# Altium PCB Y1.PcbDoc
Units mil, origin at the board's own origin, x right, y up, seen from the top; angles counter-clockwise.
Board outline 1510 x 1378.94 mil, 4 copper layers (Top Layer, Layer 1, Layer 2, Bottom Layer), stack 62.205 mil thick; 69 components, 77 nets, 245 pads, 64 vias.
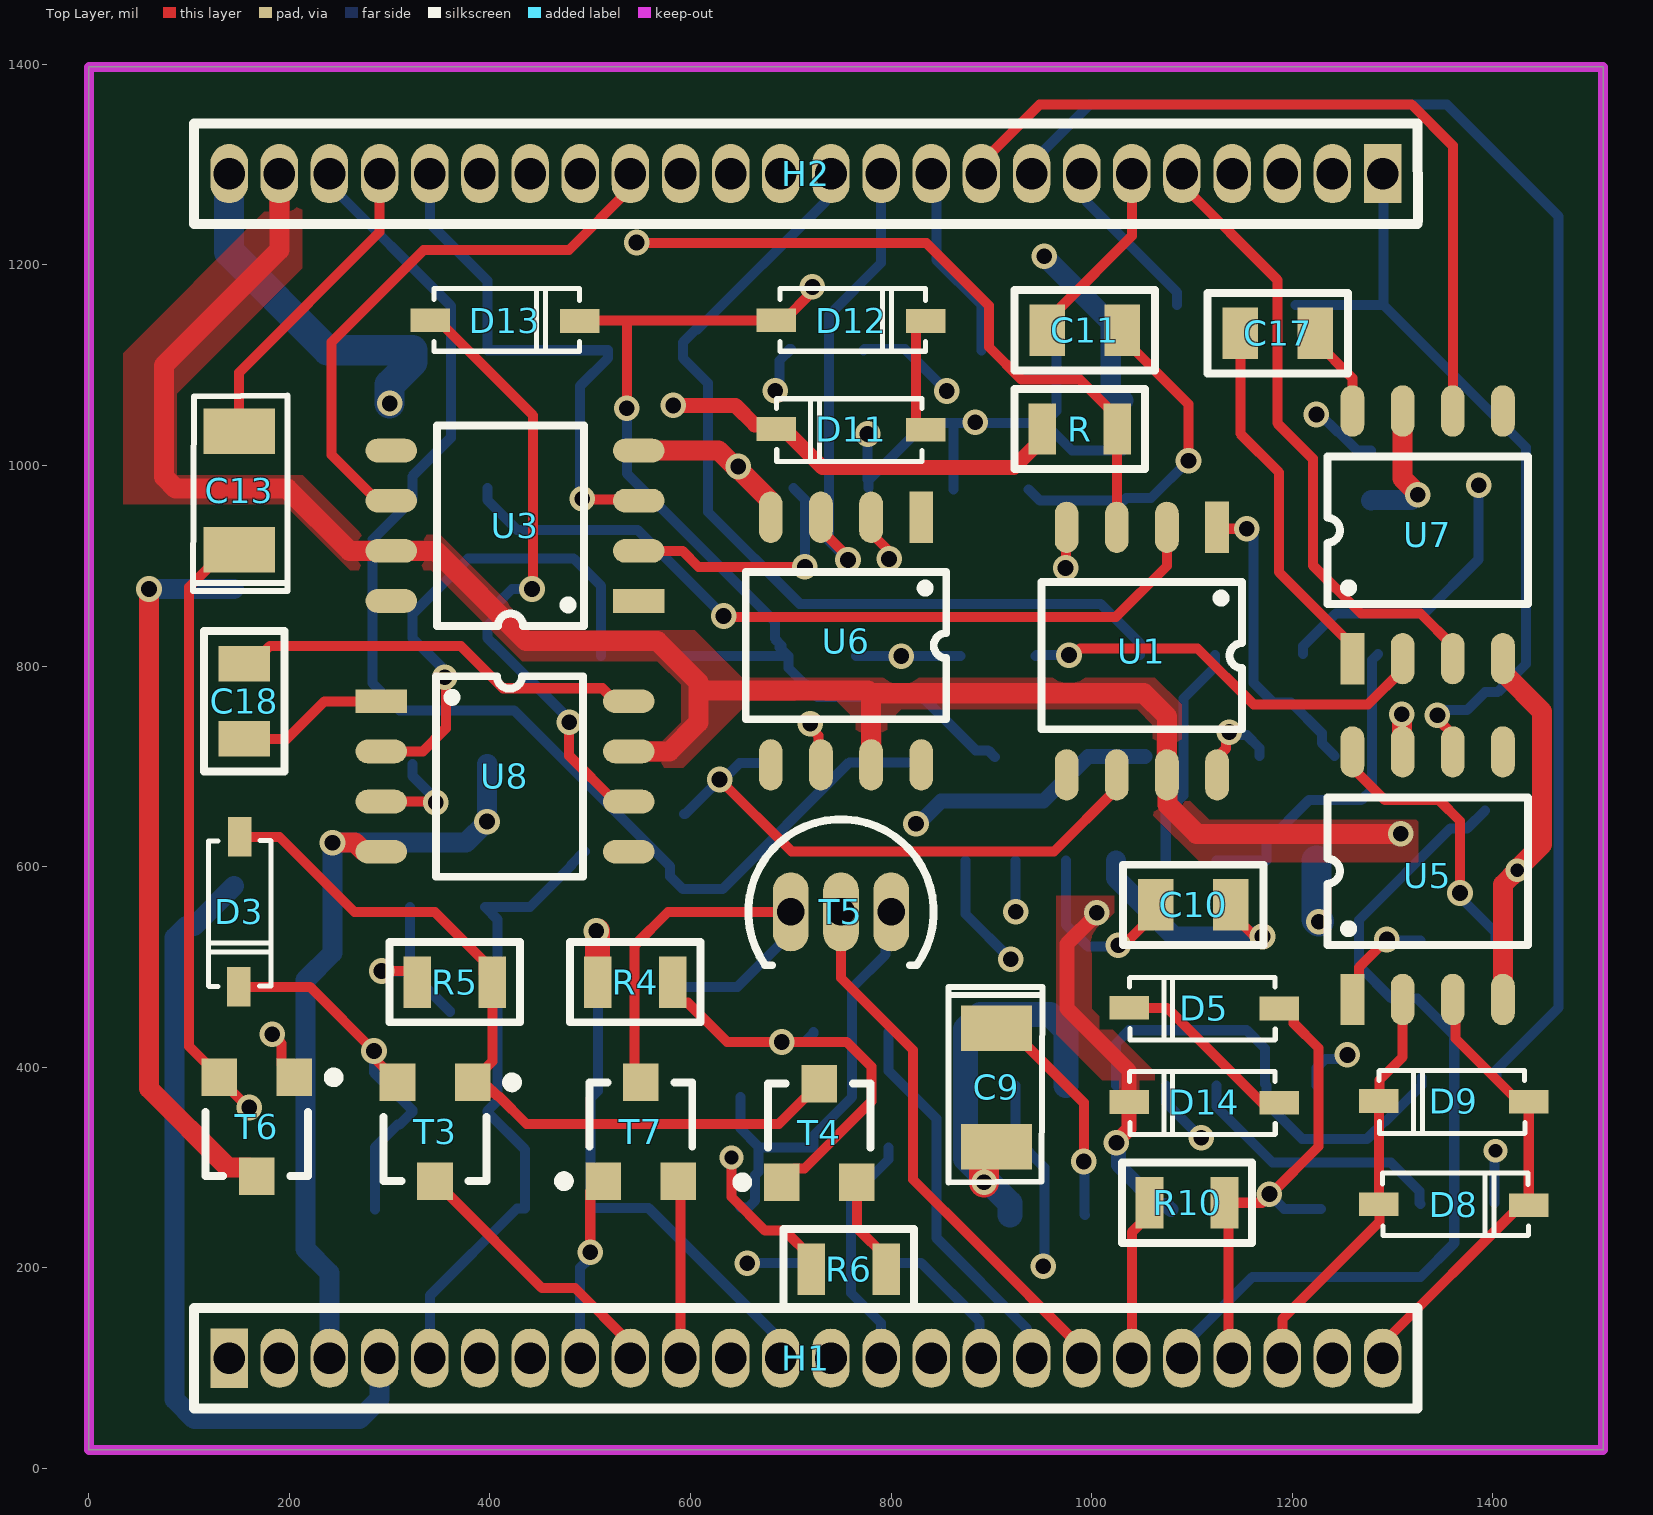
[diagram p0: Top Layer view]
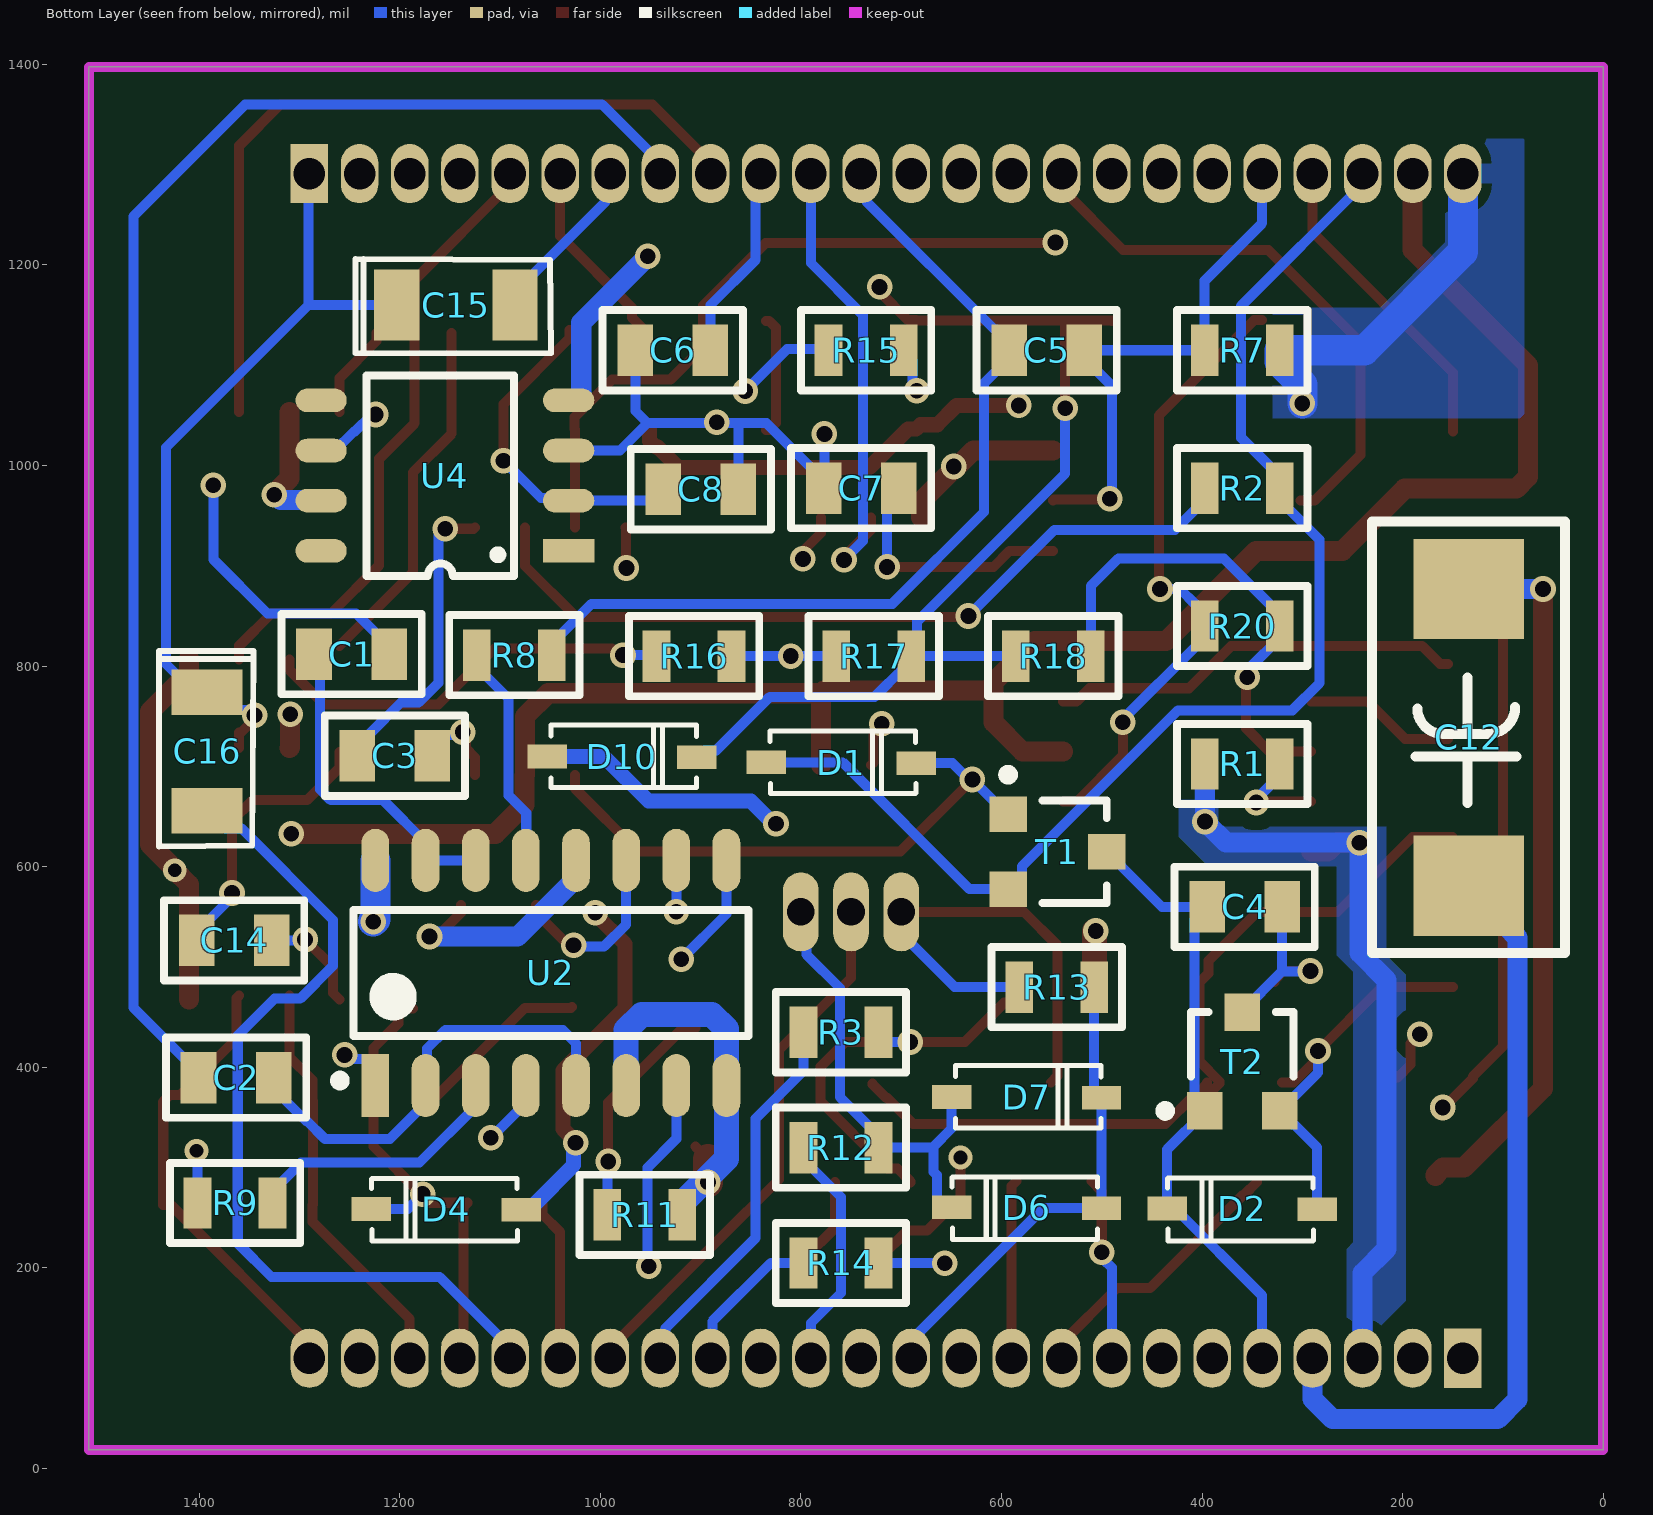
[diagram p1: Bottom Layer view, seen from below]
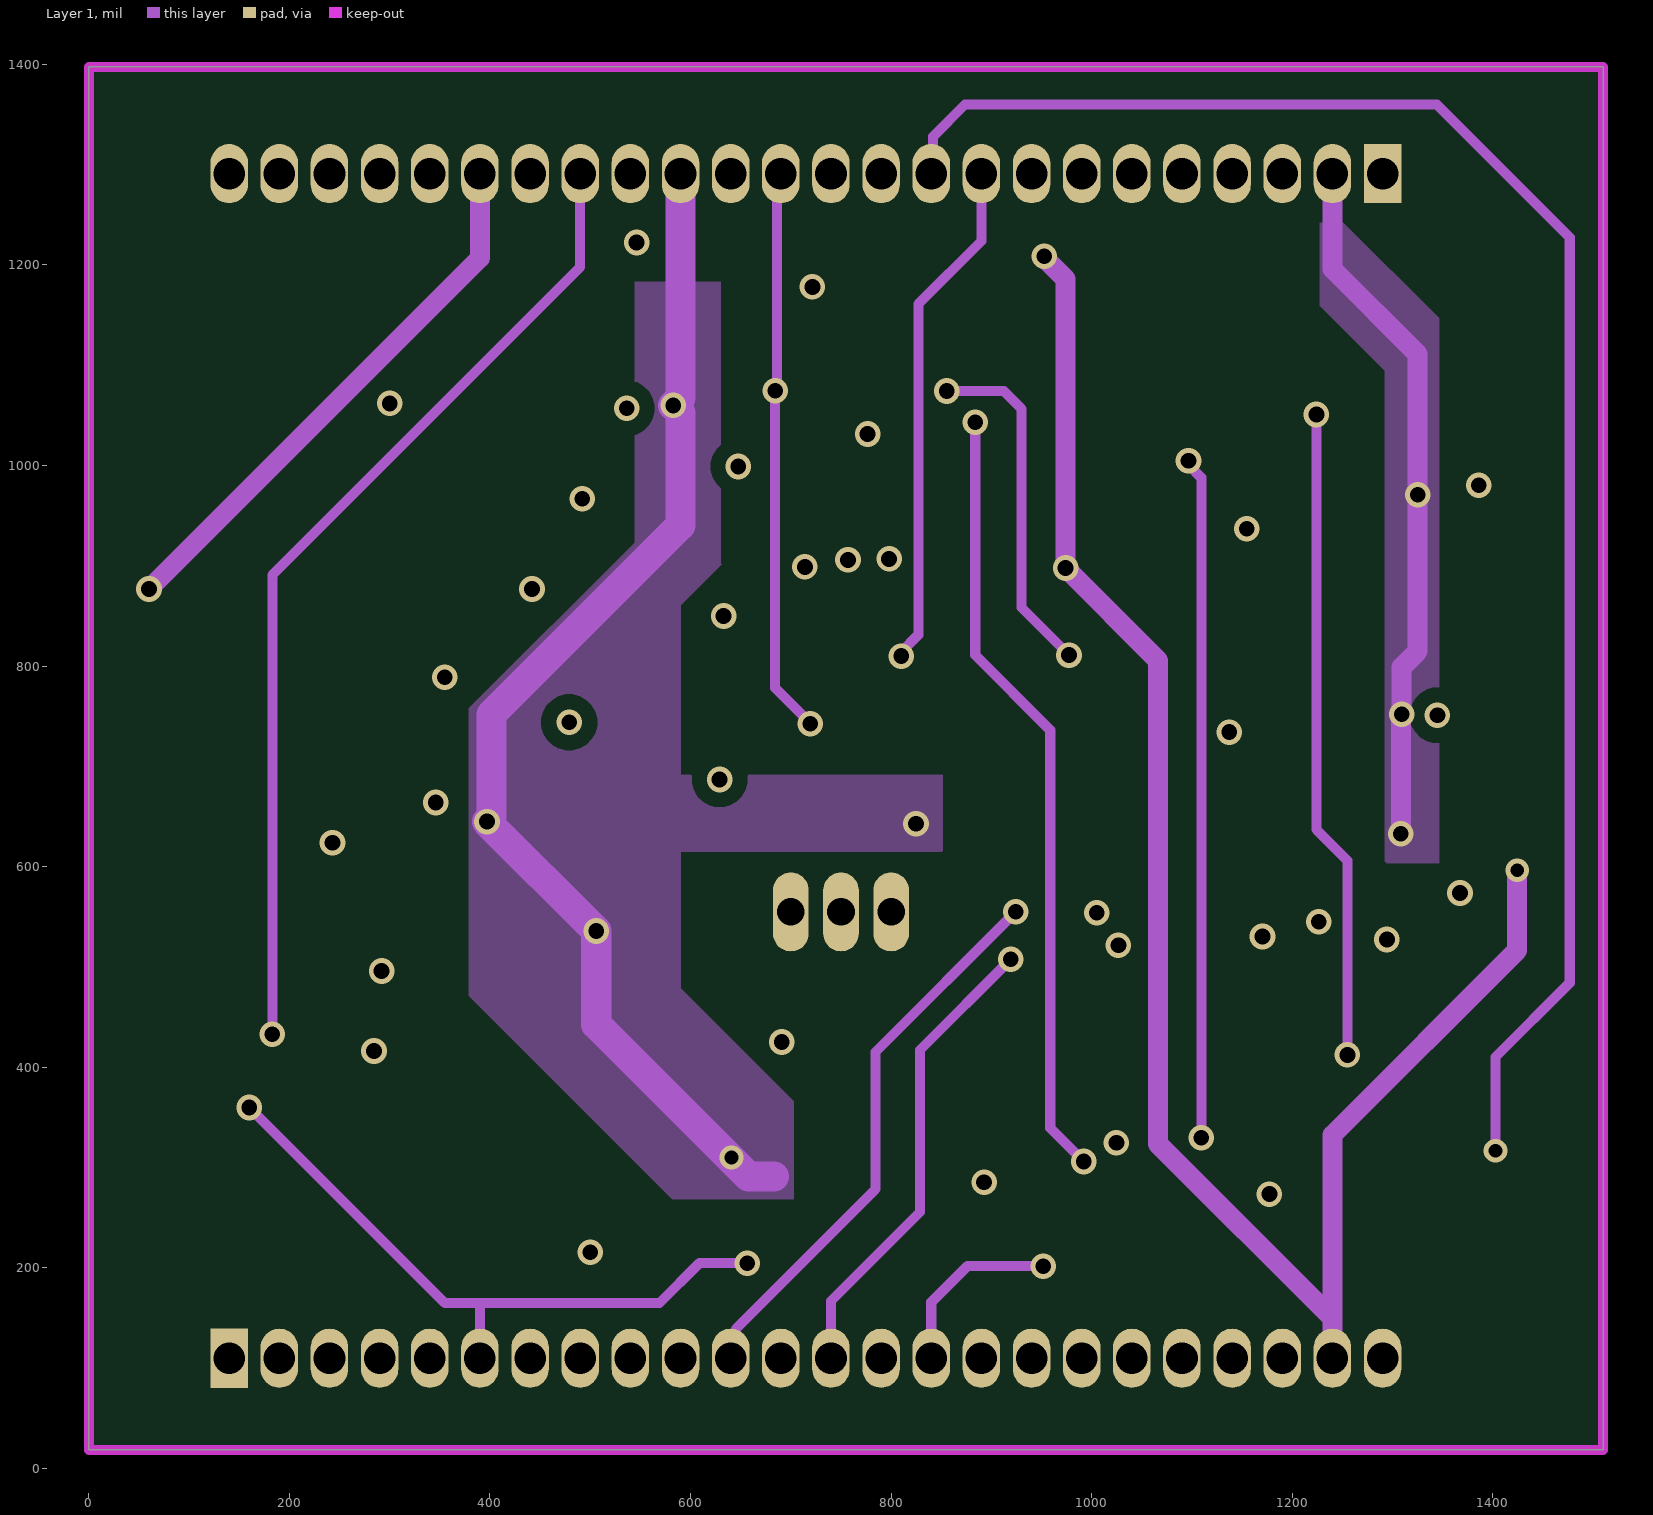
[diagram p2: Layer 1]
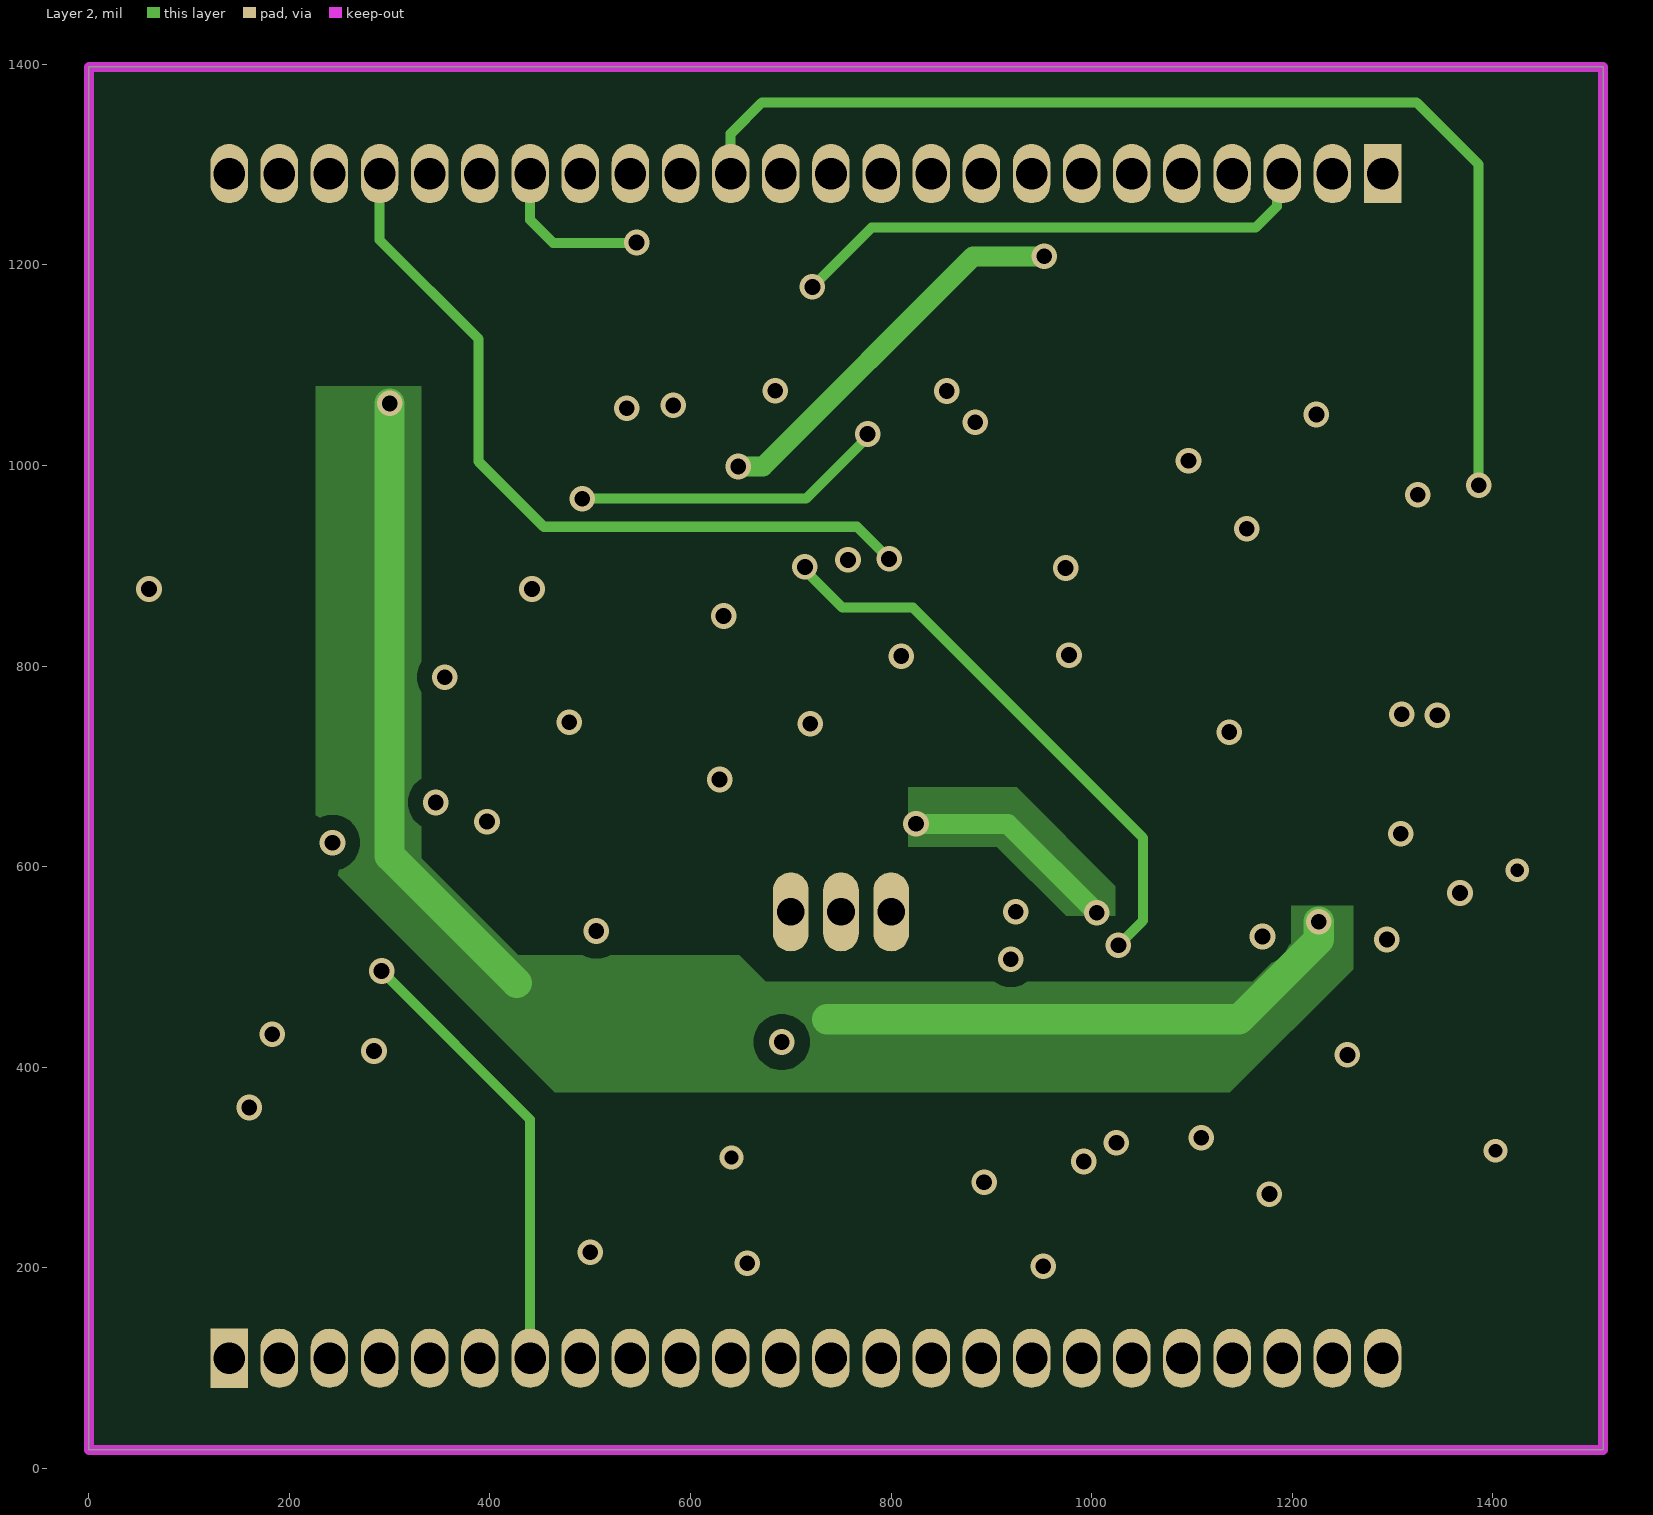
[diagram p3: Layer 2]

## Layer stack, top to bottom
Top Solder: solder mask 0.4, Solder Resist, Dk 3.5
Top Layer: signal copper 1.378
Dielectric 2: prepreg 4.7244, PP-006, Dk 4.1
Layer 1: signal copper 1.378
Dielectric 1: dielectric 47.2441, FR-4, Dk 4.8
Layer 2: signal copper 1.378
Dielectric 3: prepreg 4.7244, PP-006, Dk 4.1
Bottom Layer: signal copper 1.378
Bottom Solder: solder mask 0.4, Solder Resist, Dk 3.5

## Board outline
0,18.7 0,1397.64 1510,1397.64 1510,18.7

## Design rules (kind name [scope] priority, off if disabled: settings)
Clearance Clearance_polygon_via [InPolygon vs IsVia] p1: gap=15 ignorepadtopadclearanceinfootprint=FALSE
Clearance [All] p2: gap=10 ignorepadtopadclearanceinfootprint=FALSE except(0: Arc-Hole Track-Hole SMDPad-Hole THPad-Hole Via-Hole Fill-Hole Poly-Hole Region-Hole Text-Hole)
MinimumSolderMaskSliver [All] p1: minsoldermaskwidth=3.94
PolygonConnect PolygonConnect_1 [IsPolygon vs isvia] p1: connectstyle=Direct reliefconductorwidth=10 reliefentries=4 polygonreliefangle="90 Angle" airgapwidth=10
PolygonConnect [All] p2: connectstyle=Relief reliefconductorwidth=20 reliefentries=4 polygonreliefangle="90 Angle" airgapwidth=10
RoutingVias [All] p1: holewidth=13.78 width=23.62 viastyle="Through Hole" minholewidth=11.81 minwidth=21.65 maxholewidth=15.75 maxwidth=31.5
SilkToSolderMaskClearance [IsPad] p1: minsilkscreentomaskgap=3.94 clearancetoexposedcopper=TRUE
SolderMaskExpansion [All] p1: expansion=4 istentingtop=FALSE
Width Width_PWR [(InNet('-13V') OR InNet('GND'))] p1: maxlimit=100 minlimit=10 preferedwidth=15
Width [All] p2: maxlimit=50 minlimit=10 preferedwidth=15
28 further rules are at their usual default settings.

## Components (designator, comment, footprint, x,y, rotation, side; value= is the part's Value field where it differs from the comment)
C1 "3.9 nF/50V" C0805 1248.03,812.01 r0 bottom
C2 "3.9 nF/50V" C0805 1363.19,389.76 r0 bottom
C3 "4.7 nF/50V" C0805 1204.72,710.63 r180 bottom
C4 "300 pF/50V" C0805 357.6,560 r0 bottom
C5 "120 pF/50V" C0805 555,1115 r0 bottom
C6 "120 pF/50V" C0805 927.6,1115 r180 bottom
C7 "39 pF/50V" C0805 740,977.5 r180 bottom
C8 "39 pF/50V" C0805 899.61,976.38 r180 bottom
C9 "3.3 µF/10V" 3216 905,380 r270 top value="47uF/16 - 50V"
C10 "910 pF/50V" C0805 1101.38,562.01 r0 top
C11 "910 pF/50V" C0805 993.19,1135 r180 top
C12 "15 µF/16 V" "smd 7343" 134.17,600 r90 bottom value=10uF/50V
C13 "3.3 µF/16 V" 3216 150,975 r90 top value=10uF/50V
C14 "36 pF/50V" C0805 1365.16,526.57 r0 bottom
C15 "4.7 µF/50V" 3216 1144.06,1160 r180 bottom value=10uF/50V
C16 "1.5 µF/50V" 3216 1392,715 r270 bottom value=10uF/50V
C17 "36 pF/50V" C0805 1185.6,1132 r0 top
C18 "100 pF/50V" C0805 155,765 r90 top
D1 "1N4148" SOD123 759.84,703.74 r180 bottom
D2 "1N4148" SOD123 360,258.84 r0 bottom
D3 "1N4148" SOD123 150,555 r270 top
D4 "1N4148" SOD123 1153.6,258.47 r0 bottom
D5 "1N4148" SOD123 1112,459 r180 top
D6 "1N4148" SOD123 575,260 r0 bottom
D7 "1N4148" SOD123 575,370 r180 bottom
D8 "1N4148" SOD123 1361,263 r0 top
D9 "1N4148" SOD123 1361,366 r180 top
D10 "1N4148" SOD123 978.35,709.65 r180 bottom
D11 "1N4148" SOD123 760,1036 r180 top
D12 "1N4148" SOD123 760,1144.64 r0 top
D13 "1N4148" SOD123 415,1144.64 r0 top
D14 "1N4148" SOD123 1112,365 r180 top
H1 "Header 24" "header 24" 715,110 r0 top
H2 "Header 24" "header 24" 715,1291.1 r180 top
R "51k" R0805 988.19,1036.42 r0 top
R1 "39k" R0805 360,702.5 r0 bottom
R2 "51k" R0805 360,977.5 r0 bottom
R3 "6.2k" R0805 760,435 r0 bottom
R4 "5.6k" R0805 545,485 r0 top
R5 "51k" R0805 365,485 r180 top
R6 "620k" R0805 757.87,198.82 r180 top
R7 "6.2k" R0805 360,1115 r0 bottom
R8 "20k" R0805 1085.63,811.02 r180 bottom
R9 "20k" R0805 1364.17,264.76 r0 bottom
R10 "30k" R0805 1095,265 r180 top
R11 "2k" R0805 955.71,252.95 r180 bottom
R12 "10k" R0805 760,320 r180 bottom
R13 "51k" R0805 545,480 r0 bottom
R14 "39k" R0805 760,205 r0 bottom
R15 "20k" R0805 735,1115 r0 bottom
R16 "20k" R0805 906.53,810 r0 bottom
R17 "30k" R0805 727.43,810 r0 bottom
R18 "150k" R0805 548.33,810 r0 bottom
R20 "150k" R0805 360,840 r0 bottom
T1 "C1815" SOT-23 593.43,652.4 r270 bottom value=C9014
T2 "C1815" SOT-23 397.4,356.57 r180 bottom value=C9014
T3 "A1015" SOT-23 382.62,385 r180 top
T4 "C1815" SOT-23 690.94,285.43 r0 top value=C9014
T5 "2SJ74" TO-92 750,555 r270 top
T6 "A1015" SOT-23 204.8,390 r180 top
T7 "A1015" SOT-23 513.13,286.57 r0 top
U1 "AD707" SOIC8 1050,815 r270 top
U2 "KP1-CD4052" soic16n 1049.21,494.09 r90 bottom
U3 "OP07" SOIC8 425,940 r180 top
U4 "OP07" SOIC8 1155,990 r0 bottom
U5 "AD707" SOIC8 1335,591.06 r90 top
U6 "OP07" SOIC8 755,825 r270 top
U7 "AD707" SOIC8 1335,930.98 r90 top
U8 "AD707" SOIC8 415,690 r0 top

## Footprints (in the part's own frame and the unit in brackets; to place one, negate y for a bottom-side part, rotate by r counter-clockwise, add the part's x,y. Pads: shape width x height; smd on the part's side, far side on the other; paste and mask are expansions set on the pad)
3216 [mm] "Tantalum type A 1206"
  rect 1.15x1.8 smd: 1(-1.5,0) 2(1.5,0)
  silkscreen extent -2.54,-1.22 2.41,1.17, body extent -1.7,-0.9 1.7,0.9, height 1
C0805 [mm]
  rect 0.9x1.3 smd: 1(-0.95,0) 2(0.95,0)
  silkscreen extent -1.78,-1.02 1.78,1.02, body extent -1,-0.6 1,0.6, height 1.5
"header 24" [mm]
  rect 0.95x1.5 hole 0.8: 1(-14.605,0)
  oval 0.95x1.5 hole 0.8: 2(-13.335,0) 3(-12.065,0) 4(-10.795,0) 5(-9.525,0) 6(-8.255,0) 7(-6.985,0) 8(-5.715,0) 9(-4.445,0) 10(-3.175,0) 11(-1.905,0) 12(-0.635,0) 13(0.635,0) 14(1.905,0) 15(3.175,0) 16(4.445,0) 17(5.715,0) 18(6.985,0) 19(8.255,0) 20(9.525,0) 21(10.795,0) 22(12.065,0) 23(13.335,0) 24(14.605,0)
  silkscreen extent -15.5,-1.27 15.49,1.27
R0805 [mm]
  rect 0.7x1.3 smd: 1(-0.95,0) 2(0.95,0)
  silkscreen extent -1.65,-1.02 1.65,1.02, body extent -1,-0.6 1,0.6, height 0.7
"smd 7343" [mm]
  rect 2.54x2.8 smd: 1(-0.483,0) 2(7.037,-0.008)
  silkscreen extent -2.18,-2.44 8.75,2.44, body extent -0.66,-2.3 6.94,2.3, height 4.01
SOD123 [mm]
  rect 1x0.6 smd: 1(-1.899,0.01) 2(1.899,-0.01)
  silkscreen extent -1.8,-0.78 1.89,0.81, body extent -1.8,-0.8 1.9,0.8, height 1.27
SOIC8 [mm]
  rect 1.3x0.6 smd: 1(-3.135,1.905)
  oval 1.3x0.6 smd: 2(-3.135,0.635) 3(-3.135,-0.635) 4(-3.135,-1.905) 5(3.135,-1.905) 6(3.135,-0.635) 7(3.135,0.635) 8(3.135,1.905)
  silkscreen extent -1.75,-2.54 1.98,2.54, body extent -3.06,-2.43 3.08,2.46, height 1.78
soic16n [mm] "SOIC, 16-Leads, Body 9.90x3.90mm, Pitch 1.27mm, IPC Medium Density"
  rect 1.6x0.7 smd: 1(-2.852,4.445)
  oval 1.6x0.7 smd: 2(-2.852,3.175) 3(-2.852,1.905) 4(-2.852,0.635) 5(-2.852,-0.635) 6(-2.852,-1.905) 7(-2.852,-3.175) 8(-2.852,-4.445) 9(2.852,-4.445) 10(2.852,-3.175) 11(2.852,-1.905) 12(2.852,-0.635) 13(2.852,0.635) 14(2.852,1.905) 15(2.852,3.175) 16(2.852,4.445)
  silkscreen extent -2.85,-5 1.6,5.47, body extent -3.06,-5 3.02,5, height 1.65
SOT-23 [mm]
  rect 0.9x0.95 smd: 1(0,0) 2(1.9,0) 3(0.95,2.5)
  silkscreen extent -1.12,-0.13 2.25,2.5, body extent -0.48,-0.19 2.42,2.61, height 1.3
TO-92 [mm] "TO, Flat Index; 3 In-Line, Axial Leads; Body Dia. 4.6mm; Leads 0.41 x 0.39 mm (max)"
  oval 2x0.9 hole 0.7: 1(0,1.27) 2(0,0) 3(0,-1.27)
  silkscreen extent -2.34,-2.34 1.35,2.34

## Part data
C1 C2 C3 C4 C5 C6 C7 C8 C10 C11 C14 C17 C18: library part "Cap ceramic", "None polar capacitor", ASiD Part Number=C-AS
C9: library part CP2, "C 47uF/50V , 220uF/16V", Description 1="470uF/6,3V - 330uF/10V - 220uF/16V", Description 2="100uF/25V - 35V - 47uF/50V - 22uF/100V", Description 3="33uF => 47uF/63V - 1uF => 4,7uF/160V", Description 4="1uF => 2,2uF/250V - 1uF/350V"
C12 C13 C15 C16: library part CP1, "Cap P  0,1uF < 22uF , 16 - 50V", Description 1="10 => 220uF/6,3V/10V - 10uF => 100uF/16V", Description 2="0,1uF => 33uF/50V - 10uF => 22uF/63V", Description 3="0,47uF => 10uF/100V"
D1 D2 D3 D4 D5 D6 D7 D8 D9 D10 D11 D12 D13 D14: library part "Diode S4", "Dán", Chung_Loai=Dán, Don_Vi=Con, Ma_Hang=MH005519, Ten_Linh_Kien="Diode S4 SOD123 ( 1N5819 SOD123)"
R R1 R2 R3 R4 R5 R6 R7 R8 R9 R10 R11 R12 R13 R14 R15 R16 R17 R18 R20: library part Res, "Standard resistor", ASiD Part Number=Res-AS
T1 T2 T4: library part "Trans C1815 HF SMD", "SOT-23"
T3: library part "Trans A1015 BA SMD", "PNP 600mW, ECB"
T5: library part "JFET P CHANNEL"
T6 T7: library part PNP_ECB, "P 600mW, ECB"
U1 U5 U7 U8: library part OP07DD, "Low-Offset Voltage Operational Amplifier, 6 to 36 V, 0 to 70 degC, 8-pin SOIC (D8), Green (RoHS & no Sb/Br)", Manufacturer="Texas Instruments", Rating=Catalog, Supplier Part Number 1=296-9621-5-ND, Total Supply Voltage(Max)(+5V is 5, +/-5V is 10)=36, Total Supply Voltage(Min)(+5V is 5, +/-5V is 10)=6, CMRR(Min)(dB)=94, Code_JEDEC=MS-012, ComponentLink1Description="Manufacturer URL", ComponentLink1URL=http://www.ti.com/, ComponentLink2Description=Datasheet, ComponentLink2URL=http://www.ti.com/lit/ds/symlink/op07d.pdf, ComponentLink3Description="Package Specification", ComponentLink3URL=http://www.ti.com/litv/pdf/msoi002j, DatasheetVersion=SLOS099E, Eco-Plan="Green (RoHS & no Sb/Br)", GBW(Typ)(MHz)=0.6, IIB(Max)(pA)=12000, Iq per channel(Max)(mA)=5, Mounting Technology="Surface Mount", Number of Channels=1, Offset Drift(Typ)(uV/C)=0.7, PackageDescription="8-Pin Plastic Small Outline, Body 4.9 x 3.9 mm, Pitch 1.27 mm", PackageReference=D8, PackageVersion="4040047-3/M, 06/2011", PartNumber=OP07DD, Slew Rate(Typ)(V/us)=0.3, Sub Family="General Purpose Amplifier, High Supply Voltage Amplifier (>=30V), Low Noise Amp (<=10nV/rtHz), Low Offset Voltage Amplifier (<=500uV)", Supplier 1=Digi-Key, Supplier 2=Farnell, Supplier 3=Newark, Supplier 4=Newark, Supplier 5=Mouser, Supplier Part Number 2=1459541, Supplier Part Number 3=61M8137, Supplier Part Number 4=91B7408, Supplier Part Number 5=595-OP07DD, Vio (25C)(Max)(mV)=0.15, Vn at 1kHz(Typ)(nV/rtHz)=9.8
U3 U4 U6: library part 744UD1A/U1-4

## Via types
v1: diameter 25.59, hole 15.75, Top Layer to Bottom Layer, tented both sides, 61 vias
v2: diameter 23.62, hole 13.78, Top Layer to Bottom Layer, 3 vias

## Nets (pads, with @x,y where several pads share a name; then routed paths per layer and width w, separated by ;. In a path a pad name is that pad's centre, name@x,y a point inside that pad or via, vN(x,y) a via of type N, cw(c..) or ccw(c..) an arc to the next point about the centre after c; other vN are vias at no path point)
1_1: H1.1
1_2: H1.2
1_3: D4.1 D10.1 D11.2 D14.2 H1.3 H2.15 R1.2 R4.1 R6.2 R.1 U8.4 | length 3489.6
  Top Layer w10: v2(640.75,310.04) 640.75,270.67 674.25,237.17 693.94,237.17 720.47,210.63 R6.2
  Top Layer w15: v1(582.68,1060.04) 644.69,1060.04 664.02,1040.7 680.94,1040.7 D11.2 693.13,1036.39 731.48,998.03 922.24,998.03 942.54,1018.33 944.51,1018.33 950.79,1024.61 R.1 ; v1(1004.92,554.13) 1004.92,552.67 975.39,523.14 975.39,458.66 1037.25,396.8 1037.25,361.09 1037.27,338.48 1024.61,325.82 v1(1024.61,324.8)
  Top Layer w20: v1(243,624) 265.65,624 274.65,615 U8.4
  Top Layer w25: R4.1@507.22,485.38 v1@507.22,536
  Layer 1 w30: H2.15 590,1067.36 v1(582.68,1060.04) 590,1052.72 590,940.39 401.57,751.97 401.57,649.57 v1(397,645) v1(506,536) 506,442.82 657.85,290.97 682.7,290.97 683.07,291.34
  Layer 2 w20: v1(824.8,642.95) 825.04,642.72 916.34,642.72 v1(1004.92,554.13)
  Bottom Layer w15: v1(824.8,642.95) 827.37,642.95 849.77,665.35 951.77,665.35 996.45,710.03 D10.1 ; v1(1024.61,324.8) 1026.63,322.78 1026.63,302.42 1066.67,262.39 1074.54,262.39 D4.1
  Bottom Layer w20: H1.3 240,195 216,219 216,487 243,514 v1(243,624) 376,624 v1(397,645) 397.2,645.2 397.2,702.3 R1.2
1_4: C12.1 H1.4 | length 802.6
  Bottom Layer w20: C12.1@145,581 105,541 97.35,541 85.63,529.28 85.63,68.9 105.32,49.21 269.69,49.21 290,69.53 H1.4
1_5: C4.2 D2.2 H1.5 T1.3 T2.1 | length 642.2
  Bottom Layer w10: H1.5 340,172.35 426.87,259.22 D2.2 434.75,318.24 397.4,355.59 T2.1 407.72,366.89 407.72,547.28 C4.2 440,560 481.3,601.3 481.3,602.28 494.02,615 T1.3
1_6: C13.1 H1.6 R14.1 T6.2 | length 1324.5
  Top Layer w10: C13.1 137.2,915.94 119.57,898.31 100,878.74 100,420.98 130,390.98 T6.2 130,389.02 159.02,360 v1(160,360)
  Layer 1 w10: v1(160,360) 355,165 390,165 ; H1.6 390,165 ; v1(656.5,204.72) 608.72,204.72 569,165 390,165
  Bottom Layer w10: v1(656.5,204.72) 722.32,204.72 R14.1
1_7: C4.1 H1.7 R5.2 T2.3 | length 645.9
  Top Layer w10: v1(292,496) 318.82,496 327.6,487.22 R5.2 ; H1.7@434.76,115.24 H1.7
  Layer 2 w10: v1(292,496) 440,348 H1.7
  Bottom Layer w10: v1(292,496) 292.21,495.79 320.2,495.79 ; C4.1 320.2,495.79 ; T2.3 360,455.98 320.2,495.79
1_8: H1.8 T7.1 | length 184.9
  Top Layer w10: v1(500,215.55) 500,276.38 T7.1@510.2,286.57
  Bottom Layer w10: H1.8 490,200.31 497.39,207.71 497.39,212.94 v1(500,215.55)
1_9: H1.9 T3.3 | length 277.3
  Top Layer w10: T3.3 345.22,285.59 357.93,272.87 358.92,272.87 451.67,180.12 484.88,180.12 540,125 H1.9
1_10: H1.10 T7.2 | length 178.6
  Top Layer w10: T7.2@585,286.57 590,281.58 H1.10
1_11: H1.11 U2.10 | length 614.1
  Layer 1 w10: H1.11 645.24,115.24 645.24,139.34 784.45,278.54 784.45,415.35 v1(924.21,555.12)
  Bottom Layer w10: v1(924.21,555.12) U2.10
1_12: D6.1 D7.2 H1.12 R13.1 | length 486
  Bottom Layer w10: R13.1 507.6,376.42 500.79,369.61 D7.2 D6.1 558.3,259.61 690,127.91 H1.12
1_13: H1.13 U2.9 | length 589.3
  Layer 1 w10: H1.13 740,167.17 828.74,255.91 828.74,417.32 v1(919.29,507.87)
  Bottom Layer w10: U2.9 874.21,552.95 v1(919.29,507.87)
1_14: H1.14 R12.1 | length 237.9
  Bottom Layer w10: H1.14 790,145 760,175 760,270.79 797.4,308.19 R12.1
1_15: H1.15 U2.7 | length 374.7
  Layer 1 w10: H1.15 840,165.79 875.98,201.77 v1(951.77,201.77)
  Bottom Layer w10: U2.7 924.21,328.74 952.76,300.2 952.76,202.76 v1(951.77,201.77)
1_16: H1.16 R14.2 | length 152.5
  Bottom Layer w10: R14.2 830,205 888.26,146.74 888.26,111.74 H1.16
1_17: H1.17 R3.2 | length 384.1
  Bottom Layer w10: R3.2 797.4,396.5 845,348.9 845,230 934.76,140.24 934.76,115.24 H1.17
1_18: H1.18 T5.2 | length 544.4
  Top Layer w10: T5.2 750,489.17 821.85,417.32 821.85,288.15 884,226 990,120 H1.18
1_19: H1.19 R10.2 | length 162.3
  Top Layer w10: H1.19 1040,235.59 1057.6,253.19 R10.2
1_20: C16.2 H1.20 | length 872.6
  Bottom Layer w10: H1.20 1090,120.83 1160.12,190.94 1327.76,190.94 1361.46,224.65 1361.46,431.85 1324.8,468.5 1299.21,468.5 1266.5,501.22 1266.5,547.01 1357.8,638.31 1374.36,638.31 C16.2
1_21: D4.2 D5.1 H1.21 R10.1 | length 475.9
  Top Layer w10: R10.1 1136.2,261.2 1136.2,113.8 H1.21 ; R10.1@1136.2,265 v1@1170,265 ; v1@1177.89,272.89 1226.14,321.14 1226.14,419.22 1201.43,443.93 1201.43,451.8 1194.62,458.61 D5.1
  Bottom Layer w10: v1(1177.17,273.62) 1191.93,258.86 D4.2
1_22: D8.1 D9.2 H1.22 U5.2 | length 411.9
  Top Layer w10: H1.22 1190,149 1287,246 1287,262.64 D8.1 D9.2 1286.95,367.09 1286.95,387.34 1310,410.39 U5.2@1310,471.58
1_23: H1.23 U1.4 U3.4 U4.4 U5.4 U6.4 U7.4 | length 2895.8
  Top Layer w10: v1(974,897.81) 974.5,898.31 974.5,937.92 U1.4
  Top Layer w20: U3.4 627.97,1015 643.95,999.02 v1(647.64,999.02) 647.64,996.79 680,964.43 U6.4 ; U5.4 1410,582.24 v2(1424.21,596.46) 1424.21,597.44 1449.11,622.33 1449.11,754.67 1410,793.78 U7.4
  Layer 1 w20: v1(952.76,1208.66) 952.76,1207.15 974,1185.9 v1(974,897.81) 1065.94,805.87 1065.94,323.82 1240,149.76 ; H1.23 1240,149.76 ; v2(1424.21,596.46) 1424.21,516.73 1240,332.52 1240,149.76
  Layer 2 w20: v1(647.64,999.02) 672.18,999.02 881.82,1208.66 v1(952.76,1208.66)
  Bottom Layer w20: v1(952.76,1208.66) 1019,1142.42 1019,1071.29 1025.29,1065 U4.4
1_24: D8.2 D9.1 H1.24 U5.3 | length 463.8
  Top Layer w10: H1.24 1290,124.74 1427.87,262.61 D8.2 D9.1 1428.94,372.42 1418.92,372.42 1362.61,428.73 1362.61,468.97 U5.3@1360,471.58
1_25: C15.1 C16.1 H2.1 U5.6 | length 785.6
  Top Layer w10: v1(1344.65,751) 1347.25,748.39 1347.25,744.7 1358.14,733.81 1360,733.81 U5.6@1360,718.42
  Bottom Layer w10: C15.1 1291,1160 ; H2.1 1291,1290.1 1291,1160 ; v1(1344.65,751) 1347.69,751 1353.1,756.42 1374.36,756.42 C16.1 1404.8,774.06 1433,802.26 1433,1018 1291,1160
1_26: H2.2 H2.23 U1.7 U3.7 U4.7 U5.7 U6.7 U7.7 U8.7 | length 2843.5
  Top Layer w20: H2.23 190,1215 75,1100 75,988.72 86.72,977 198,977 260,915 U3.7 346,915 436,825 567,825 608,784 608,744 579,715 U8.7 ; 608,775.91 777.09,775.91 780,773 ; U6.7 780,773 ; v1(1308.07,632.87) 1104.65,632.87 1075.69,661.83 1075.69,690.89 U1.7 1075,750 1052,773 780,773 ; v1(1309.06,751.97) 1309.53,751.5 1309.53,718.89 U5.7@1310,718.42 ; U7.7@1310,1053.42 1310,987 1325,972 v1(1325,971)
  Layer 1 w20: H2.2 1240,1196.02 1325,1111.02 v1(1325,971) 1325,815 1309.06,799.06 v1(1309.06,751.97) 1308.56,751.48 1308.56,633.37 v1(1308.07,632.87)
  Bottom Layer w20: U4.7 1279.11,965.69 1318.71,965.69 1324.02,971 v1(1325,971)
1_27: D10.2 D12.1 D13.2 H2.3 R17.1 R18.2 | length 1549.4
  Top Layer w10: D13.2 490.14,1144.64 536.42,1144.64 ; v1(536.42,1057.09) 536.42,1144.64 ; v1(721.46,1178.15) 721.46,1173.36 693.13,1145.03 D12.1 684.86,1144.64 536.42,1144.64
  Layer 2 w10: v1(721.46,1178.15) 780.51,1237.2 1163.39,1237.2 1184.76,1258.58 1184.76,1285.86 H2.3
  Bottom Layer w10: v1(536.42,1057.09) 536.42,992.13 684,844.55 684,827.43 690.73,820.69 688.82,818.78 R17.1@697.6,810 ; R18.2 R17.1@697.6,810 ; D10.2 896.79,716.07 884.33,716.07 830.98,769.41 726.38,769.41 697.6,798.19 R17.1@697.6,810
1_28: H2.4
1_29: H2.5 U7.3 | length 631.1
  Top Layer w10: H2.5 1090,1280.28 1185.04,1185.24 1185.04,1042.32 1220.47,1006.89 1220.47,900.59 1268.46,852.6 1327.76,852.6 1360,820.36 U7.3@1360,806.58
1_30: C11.2 H2.6 | length 191
  Top Layer w10: C11.2 968.5,1147.72 968.5,1157.48 1040,1228.98 H2.6
1_31: C15.2 H2.7 | length 170.5
  Bottom Layer w10: H2.7 995.24,1285.86 995.24,1262.55 1085,1172.8 C15.2
1_32: C2.2 H2.8 | length 1491
  Bottom Layer w10: H2.8 940,1301.93 998.07,1360 1354,1360 1465.55,1248.45 1465.55,459.65 1403.54,397.64 C2.2@1403.54,389.76
1_33: H2.9 R16.1 R17.2 U7.6 | length 1406
  Top Layer w10: H2.9 890,1301.93 948.07,1360 1319,1360 1360,1319 U7.6@1360,1053.42
  Layer 1 w10: v1(810,810) 810,814.22 827.13,831.34 827.13,1161.13 890,1224 H2.9
  Bottom Layer w10: R17.2 v1(810,810) R16.1
1_34: C6.2 H2.10 R9.2 | length 1931.3
  Layer 1 w10: H2.10 841.68,1292.79 841.68,1327.9 873.78,1360 1344,1360 1476.61,1227.39 1476.61,484.25 1402.56,410.2 v2(1402.56,316.93)
  Bottom Layer w10: H2.10 845,1286.1 845,1205.2 890.2,1160 C6.2 ; R9.2 1401.57,315.94 v2(1402.56,316.93)
1_35: H2.11 U6.3 | length 468.1
  Top Layer w10: U6.3 730,936 757,909 v1(757,906)
  Bottom Layer w10: v1(757,906) 738,925 738,1150 790,1202 H2.11
1_36: C5.2 H2.12 R8.2 | length 906.9
  Bottom Layer w10: H2.12 734.76,1285.86 734.76,1263.3 607.05,1135.59 605.12,1135.59 592.4,1122.87 592.4,1107.13 617.36,1082.17 617.36,953.64 708.8,862.2 1008.86,862.2 1048.23,822.83 R8.2
1_37: H2.13 R15.1 U6.6 | length 661.4
  Top Layer w10: v1(719.33,742.52) 719.33,739.05 727.39,730.99 727.39,704.19 U6.6
  Layer 1 w10: H2.13 686.19,1287.29 686.19,1074.59 684.42,1072.82 684.42,778.18 719.33,743.26 v1(719.33,742.52)
  Bottom Layer w10: v1(684.42,1074.59) 688.82,1079 688.82,1104.82 700,1116 698.6,1116 R15.1
1_38: C1.1 H2.14 | length 1436.8
  Layer 2 w10: H2.14 640,1330.94 671.06,1362 1324,1362 1385.83,1300.17 v1(1385.83,980.32)
  Bottom Layer w10: C1.1 1210.63,819.88 1243.35,852.6 1331.93,852.6 1385.83,906.5 v1(1385.83,980.32)
1_40: H2.16 U3.6 | length 567.1
  Top Layer w10: U3.6 287.8,965 242,1010.8 242,1123 334,1215 478.78,1215 540,1276.22 H2.16
1_41: H2.17 T6.1 | length 1037.3
  Top Layer w10: v1(183,433) 192.09,423.91 192.09,402.72 T6.1
  Layer 1 w10: v1(183,433) 183,891 490,1198 H2.17
1_42: H2.18 R.2 U1.3 | length 847.6
  Top Layer w10: v1(546.26,1222.44) 547.24,1222.44 547.68,1222 835.09,1222 897.64,1159.45 897.64,1118.11 930.12,1085.63 988.19,1085.63 1025.59,1048.23 R.2 1025.3,1036.12 1025.3,938.72 U1.3
  Layer 2 w10: H2.18 440,1245 463,1222 v1@546.26,1222
1_43: C12.2 H2.19 T6.3 | length 1277.7
  Top Layer w20: v1(60.04,876.97) 60.04,378.94 138.7,300.28 159.68,300.28 167.4,292.56 T6.3
  Layer 1 w20: v1(60.04,876.97) 390,1206.93 H2.19
  Bottom Layer w20: v1(60.04,876.97) 144.61,876.97 C12.2@144.69,877.05
1_44: C5.1 C6.1 C7.1 C8.2 C9.1 H2.20 R7.2 R11.1 U3.3 U4.3 | length 2350.6
  Top Layer w10: v1(492,967) 493,966 547.42,966 U3.3 ; C9.1 917.8,439.06 992.13,364.72 v1(992.13,306.1)
  Layer 1 w10: v1(883.86,1043.31) 883.86,811.02 958.66,736.22 958.66,339.57 v1(992.13,306.1)
  Layer 2 w10: v1(492,967) 715.03,967 776.57,1028.54 v1(776.57,1031.5)
  Bottom Layer w10: H2.20 340,1241.69 397.4,1184.29 R7.2 C5.1 517.6,1107.13 490,1079.53 490,969 v1(492,967) ; v1(776.57,1031.5) 776.57,986.2 C7.1@777.4,985.37 ; C7.1 C7.1@777.4,985.37 ; C8.2 862.2,1042.4 ; C6.1 965,1054.49 952.91,1042.4 ; v1(992.13,306.1) 992.62,305.61 992.62,253.44 R11.1 ; U4.3 980.31,1015 952.91,1042.4 ; C7.1@777.4,985.37 790.12,998.09 834.43,1042.4 862.2,1042.4 ; 862.2,1042.4 882.95,1042.4 v1(883.86,1043.31) 884.76,1042.4 952.91,1042.4
1_45: C13.2 H2.21 U6.2 | length 1141.4
  Top Layer w10: C13.2 150,1092.91 290,1232.91 H2.21 ; U6.2 780,932.73 798,914.73 v1(798,907)
  Layer 2 w10: H2.21 290,1225 388.78,1126.22 388.78,1003.94 453.72,939 766,939 v1(798,907)
1_46: D1.1 H2.22 R2.1 T1.2 | length 1286.4
  Bottom Layer w10: H2.22 240,1280.28 361,1159.28 361,1027.71 322.6,989.31 R2.1 322.6,965.69 283,926.09 283,783 310,756 424,756 579.72,600.28 579.72,590.31 592.44,577.6 T1.2@594.41,577.6 ; T1.2 T1.2@594.41,577.6 ; D1.1 758.26,704.13 631.73,577.6 T1.2@594.41,577.6
1_48: H2.24 R7.1 U2.16 | length 1596.9
  Layer 2 w30: v1(300,1062) 300,611 426.75,484.25 ; 736.19,448 1147,448 1226.38,527.38 v1(1226.38,545.28)
  Bottom Layer w30: H2.24 140,1213 238,1115 R7.1 322.6,1103.19 300,1080.59 v1(300,1062) ; U2.16 1224.21,547.44 v1(1226.38,545.28)
GND: C9.2 R11.2 U2.6 U2.8 | length 411.9
  Top Layer w10: C9.2@892.72,308.66 C9.2
  Top Layer w30: v1(892.72,285.43) C9.2@892.72,308.66
  Bottom Layer w25: R11.2 918.31,264.76 874.21,308.86 874.21,438.11 888.86,452.76 958.66,452.76 974.21,437.2 U2.6
NetC1_2: C1.2 U2.14 U2.15 | length 332.3
  Bottom Layer w10: U2.14 U2.15 1174.21,624.09 1216.46,666.34 1268.7,666.34 1279.53,677.17 1279.53,806.1 C1.2
NetC2_1: C2.1 U2.2 U2.5 | length 457.9
  Bottom Layer w10: U2.5 1024.21,423.82 1037.4,437.01 1154.53,437.01 1172.76,418.78 1172.76,383.26 U2.2 1174.21,364.09 1209.57,328.74 1274.61,328.74 1292.32,346.46 1293.31,346.46 1328.74,381.89 C2.1@1328.74,389.76
NetC3_1: C3.1 U1.1 | length 303.2
  Top Layer w10: U1.1 1126.41,937.01 v1(1154.53,937.01)
  Bottom Layer w10: v1(1154.53,937.01) 1161.42,930.12 1161.42,783.46 1181.1,763.78 1198.82,763.78 1229.41,733.19 1229.41,723.35 C3.1
NetC3_2: C3.2 U1.8 | length 92.3
  Top Layer w10: U1.8 1125,709.04 1134.06,718.11 1134.06,731.27 v1(1137.05,734.25)
  Bottom Layer w10: v1(1137.05,734.25) 1141.27,734.25 1144.3,731.22 1154.61,731.22 1167.32,718.5 C3.2
NetC7_2: C7.2 C10.1 U2.11 U3.2 | length 1008.2
  Top Layer w10: U3.2 592,915 608,899 v1(713.98,899) ; v1(1026.57,521.65) 1029.18,524.26 1034.1,524.26 1063.98,554.13 C10.1
  Layer 2 w10: v1(713.98,899) 713.98,895.77 751.49,858.27 821.73,858.27 1051.18,628.82 1051.18,546.26 v1(1026.57,521.65)
  Bottom Layer w10: C7.2 713.98,966.11 v1(713.98,899) ; U2.11 974.21,542.52 996.06,520.67 1025.59,520.67 v1(1026.57,521.65)
NetC8_1: C8.1 C11.1 U2.4 U4.2 | length 1085.4
  Top Layer w10: C11.1 1030.59,1127.13 1096.46,1061.26 v1(1096.46,1004.92)
  Layer 1 w10: v1(1096.46,1004.92) 1096.46,1000.7 1109.25,987.91 v1(1109.25,329.72)
  Bottom Layer w10: C8.1 948.39,965 U4.2 1034.19,967.61 1059.14,967.61 v1(1096.46,1004.92) ; U2.4 1074.21,364.43 1108.92,329.72 v1(1109.25,329.72)
NetC10_2: C10.2 U2.12 | length 237
  Top Layer w10: C10.2 1138.78,554.13 1159.8,533.12 1167.67,533.12 v1(1170.28,530.51)
  Bottom Layer w20: U2.12 1024.21,588.66 1082.36,530.51 v1(1170.28,530.51)
NetC14_1: C14.1 U5.1 | length 107.6
  Top Layer w10: U5.1 1266.49,474.14 1266.49,499.76 v1(1294.29,527.56)
  Bottom Layer w10: v1@1294.29,526.57 C14.1
NetC14_2: C14.2 U5.8 | length 278.7
  Top Layer w10: U5.8 1260,698.66 1292.32,666.34 1346.46,666.34 1367.13,645.67 v1(1367.13,573.82)
  Bottom Layer w10: v1(1367.13,573.82) 1367.13,569.88 1402.56,534.45 C14.2
NetC17_1: C17.1 U7.1 | length 358
  Top Layer w10: C17.1 1148.2,1031.8 1186.68,993.32 1186.68,893.68 U7.1@1260,820.36
NetC17_2: C17.2 U7.8 | length 93.9
  Top Layer w10: C17.2 1223,1124.13 1260,1087.13 U7.8@1260,1053.42
NetC18_1: C18.1 U8.1 | length 152.1
  Top Layer w10: C18.1 197.6,727.6 235,765 U8.1
NetC18_2: C18.2 U8.8 | length 413.5
  Top Layer w10: C18.2 162.87,802.4 180.47,820 370.94,820 412.94,778 511.97,778 524.97,765 U8.8
NetD1_2: D1.2 T1.1 U1.6 | length 578.3
  Top Layer w10: v1(629,687) 700.84,615.16 962.36,615.16 1025,677.8 U1.6
  Bottom Layer w10: T1.1 594.41,652.4 v1(629,687) 632.69,687 649.04,703.35 D1.2
NetD2_1: D2.1 D3.2 T2.2 T3.2 | length 405
  Top Layer w10: D3.2 220.54,480.25 287.43,413.36 287.43,406.37 308.8,385 T3.2@320.2,385
  Bottom Layer w10: v1(284.45,416.34) 284.45,394.72 308.9,370.28 309.88,370.28 322.6,357.56 322.6,355.59 309.88,342.87 307.91,342.87 285.25,320.21 D2.1
NetD3_1: D3.1 R5.1 T3.1 T4.3 | length 815.9
  Top Layer w10: D3.1 190.25,629.75 265,555 345,555 393.62,506.38 393.62,493.78 R5.1 402.4,405.77 382.62,385.98 T3.1 382.62,384.02 395.34,371.3 T3.1@396.32,371.3 ; T3.1@395,385 395,384.02 407.72,371.3 408.7,371.3 436.5,343.5 687.99,343.5 714.65,370.16 715.63,370.16 728.35,382.87 T4.3
NetD5_2: D5.2 D14.1 | length 181.3
  Top Layer w10: D5.2@1028.13,460.39 1029.13,459.39 1074.97,459.39 D14.1@1169.75,364.61
NetD6_2: D6.2 D7.1 R12.2 T5.1 | length 451.5
  Bottom Layer w10: D6.2 657.62,260.39 664.43,267.2 664.43,292.61 667.56,295.74 667.56,321.14 649.75,338.96 D7.1 ; 667.56,320 R12.2 722.6,331.81 731.38,340.59 761,370.21 761,479 794.38,512.38 794.38,549.38 T5.1
NetD11_1: D11.1 D12.2 | length 120.5
  Top Layer w10: D11.1 831.61,1035.61 824.8,1042.42 824.8,1137.44 831.61,1144.25 D12.2
NetD13_1: D13.1 R20.2 U8.6 | length 624.6
  Top Layer w10: D13.1 348.13,1145.03 443,1050.15 443,880 442,879 v1(442,877) ; v1(479,744) 479,710.64 524.64,665 U8.6
  Bottom Layer w10: v1(442,877) 421.85,877 406.18,861.33 406.18,848.78 R20.2 397.4,828.19 406.18,819.41 406.59,819.41 479,747 v1(479,744)
NetR1_1: R1.1 U8.3 | length 103
  Top Layer w10: U8.3 345,665 v1(346,664)
  Bottom Layer w10: R1.1 322.6,690.69 346,667.29 v1(346,664)
NetR2_2: R2.2 U1.2 | length 797.3
  Top Layer w10: v1(633,850) 634,849 1024,849 1075,900 U1.2
  Bottom Layer w10: R2.2 397.4,965.69 427.09,936 547,936 v1(633,850)
NetR3_1: R3.1 R4.2 T4.1 | length 434.6
  Top Layer w10: R4.2 582.4,473.19 591.18,464.41 597.33,464.41 636.55,425.2 v1(690.94,425.2) 691.26,425.51 755.59,425.51 780.51,400.59 780.51,366.14 713.5,299.13 703.66,299.13 690.94,286.42 T4.1
  Bottom Layer w10: v1(690.94,425.2) 713.82,425.2 722.6,433.98 R3.1
NetR6_1: R6.1 T4.2 | length 98.8
  Top Layer w10: T4.2 765.75,240.16 795.28,210.63 R6.1
NetR8_1: R8.1 U2.13 | length 225.2
  Bottom Layer w10: U2.13 1073.82,606.77 1073.82,653.54 1091.54,671.26 1091.54,767.72 1123.03,799.21 R8.1
NetR9_1: R9.1 U2.3 | length 271.5
  Bottom Layer w10: U2.3 1124.21,361.02 1180.12,305.12 1298.23,305.12 1326.77,276.57 R9.1 R9.1@1327.76,263.78
NetR13_2: R13.2 T5.3 T7.3 | length 481.9
  Top Layer w10: T7.3 544.29,391.24 544.29,521.65 577.64,555 T5.3
  Bottom Layer w10: R13.2@582.4,491.81 R13.2 646.65,480 700,533.35 T5.3
NetR15_2: R15.2 R16.2 U7.2 | length 864.6
  Top Layer w10: v1(977.36,811.02) 981.58,811.02 988.24,817.68 1105.55,817.68 1161.23,762 1275.51,762 1310,796.49 U7.2@1310,806.58
  Layer 1 w10: v1(855.38,1074.34) 912.27,1074.34 930,1056.61 930,858.39 v1(977.36,811.02)
  Bottom Layer w10: R15.2 773.54,1116.14 813.57,1116.14 v1(855.38,1074.34) ; R16.2 944.96,811.02 v1(977.36,811.02)
NetR18_1: R18.1 R20.1 U8.2 | length 494.4
  Top Layer w10: U8.2 333,715 356,738 356,788 v1(355,789)
  Bottom Layer w10: v1(355,789) 352.39,791.61 352.39,798.39 322.6,828.19 322.6,851.81 378.27,907.48 483.52,907.48 510.93,880.07 R18.1
NetU2_1: U2.1 U4.6 | length 774.5
  Layer 1 w10: v1(1224,1051) 1224,637 1254.92,606.08 v1(1254.92,412.4)
  Bottom Layer w10: v1(1224,1051) 1227.69,1051 1244.73,1033.96 1245.68,1033.96 1264.64,1015 U4.6 ; U2.1 1224.21,399.53 1232.99,408.31 1247.14,408.31 1251.24,412.4 v1(1254.92,412.4)
pads on no net: U1.5 U3.1 U3.5 U3.8 U4.1 U4.5 U4.8 U5.5 U6.1 U6.5 U6.8 U7.5 U8.5

## Polygon pours and split planes (outlines as drawn)
1_26 on Layer 1 "1_26_L02_P003" (solid, remove dead copper, pour order 3): 1227.36,1242.13 1227.36,1170.28 1227.36,1159.45 1292.32,1094.49 1292.32,605.32 1294.29,603.35 1346.46,603.35 1346.46,1146.65 1250.98,1242.13
1_3 on Layer 1 "1_3_L02_P000" (solid, remove dead copper, pour order 0): 544.29,1183.07 544.29,923.23 378.94,757.87 378.94,471.46 581.69,268.7 702.76,268.7 702.76,366.14 590.04,478.86 590.04,860.71 630.91,901.57 629.92,902.56 629.92,1183.07
1_3 on Layer 1 "1_3_L02_P001" (solid, remove dead copper, pour order 1): 545.15,691.93 697.01,691.93 851.53,691.93 851.53,616.14 850.55,615.16 541.5,615.16
1_48 on Layer 2 "1_48_L03_P002" (solid, remove dead copper, pour order 2): 226.38,1078.87 226.38,613.19 464.57,375 1137.8,375 1260.83,498.03 1260.83,561.02 1198.82,561.02 1198.82,523.62 1160.43,485.24 675.2,485.24 648.62,511.81 428.15,511.81 331.69,608.27 331.69,1078.87
1_3 on Layer 2 "1_3_L03_P005" (solid, pour order 5): 816.93,679.13 816.93,620.08 905.51,620.08 974.41,551.18 1023.62,551.18 1023.62,580.71 925.2,679.13
1_3 on Bottom Layer "1_3_L04_P004" (solid, pour order 4): 383.86,639.76 216.54,639.76 216.54,511.81 196.85,492.13 196.85,167.32 236.22,127.95 255.91,127.95 255.91,218.5 249.02,225.39 249.02,495.08 265.75,511.81 265.75,600.39 393.7,600.39 423.23,629.92 423.23,728.35 383.86,728.35
1_48 on Bottom Layer "1_48_L04_P009" (solid, pour order 9): 329.72,1047.24 82.68,1047.24 78.74,1051.18 78.74,1324.8 79.72,1325.79 154.53,1325.79 157.48,1322.83 157.48,1222.44 222.44,1157.48 329.72,1157.48
1_3 on Top Layer "1_3_L01_P006" (solid, pour order 6): 964.57,570.87 964.57,433.07 1013.78,383.86 1013.78,314.96 1062.01,314.96 1062.99,313.98 1062.99,395.67 1000,458.66 1000,531.5 1022.64,554.13 1022.64,570.87
1_26 on Top Layer "1_26_L01_P007" (solid, pour order 7): 175.2,1264.76 175.2,1252.95 34.45,1112.2 34.45,961.61 194.88,961.61 260.83,895.67 341.54,895.67 432.09,805.12 566.93,805.12 590.55,781.5 590.55,744.09 571.85,725.39 524.61,725.39 524.61,699.8 523.62,698.82 592.52,698.82 659.45,765.75 745.08,765.75 764.76,746.06 764.76,717.52 796.26,717.52 796.26,743.11 810.04,756.89 1045.28,756.89 1061.02,741.14 1061.02,651.57 1108.27,604.33 1325.79,604.33 1325.79,644.68 1323.82,646.65 1117.13,646.65 1089.57,674.21 1089.57,761.81 1062.99,788.39 651.57,788.39 604.33,835.63 445.87,835.63 350.39,931.1 272.64,931.1 213.58,990.16 87.6,990.16 87.6,1071.85 212.6,1196.85 212.6,1264.76

## Keep-outs
Keep-Out Layer:
  the board outline again, w10